# Altium PCB PCB.PcbDoc
Units mm, origin at the board's own origin, x right, y up, seen from the top; angles counter-clockwise.
Board outline 50 x 83.2 mm, 2 copper layers (Top Layer, Bottom Layer); 21 components, 10 nets, 72 pads, 0 vias.
Unrouted connection lines stored in the file: 40.
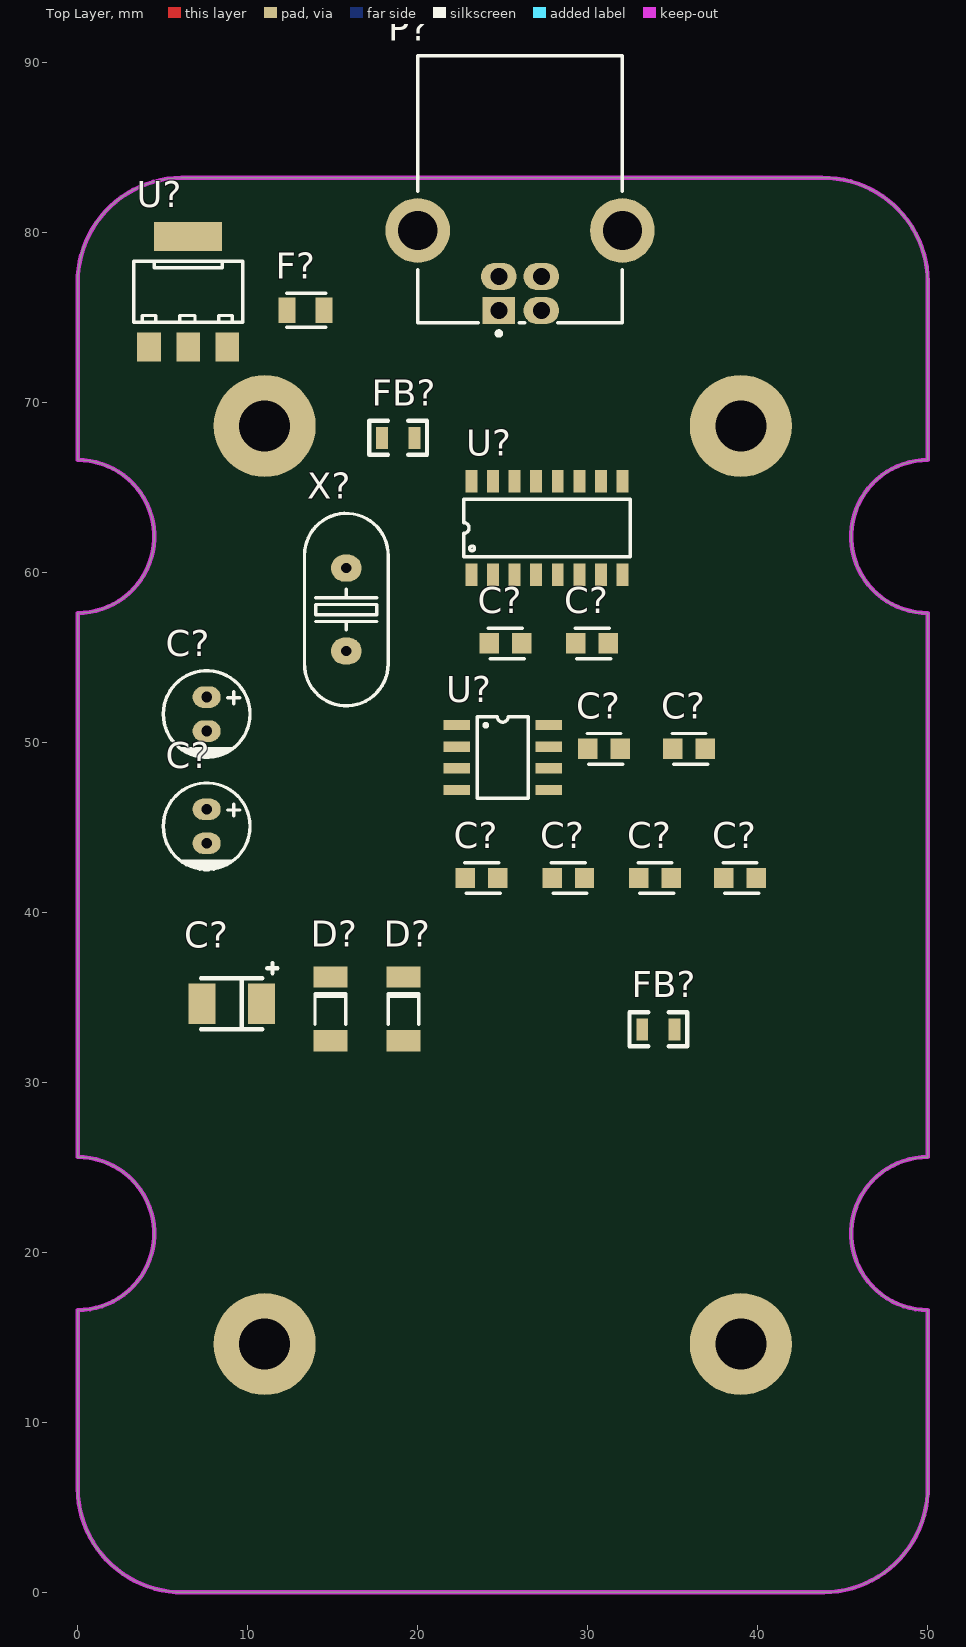
[diagram p0: Top Layer view]
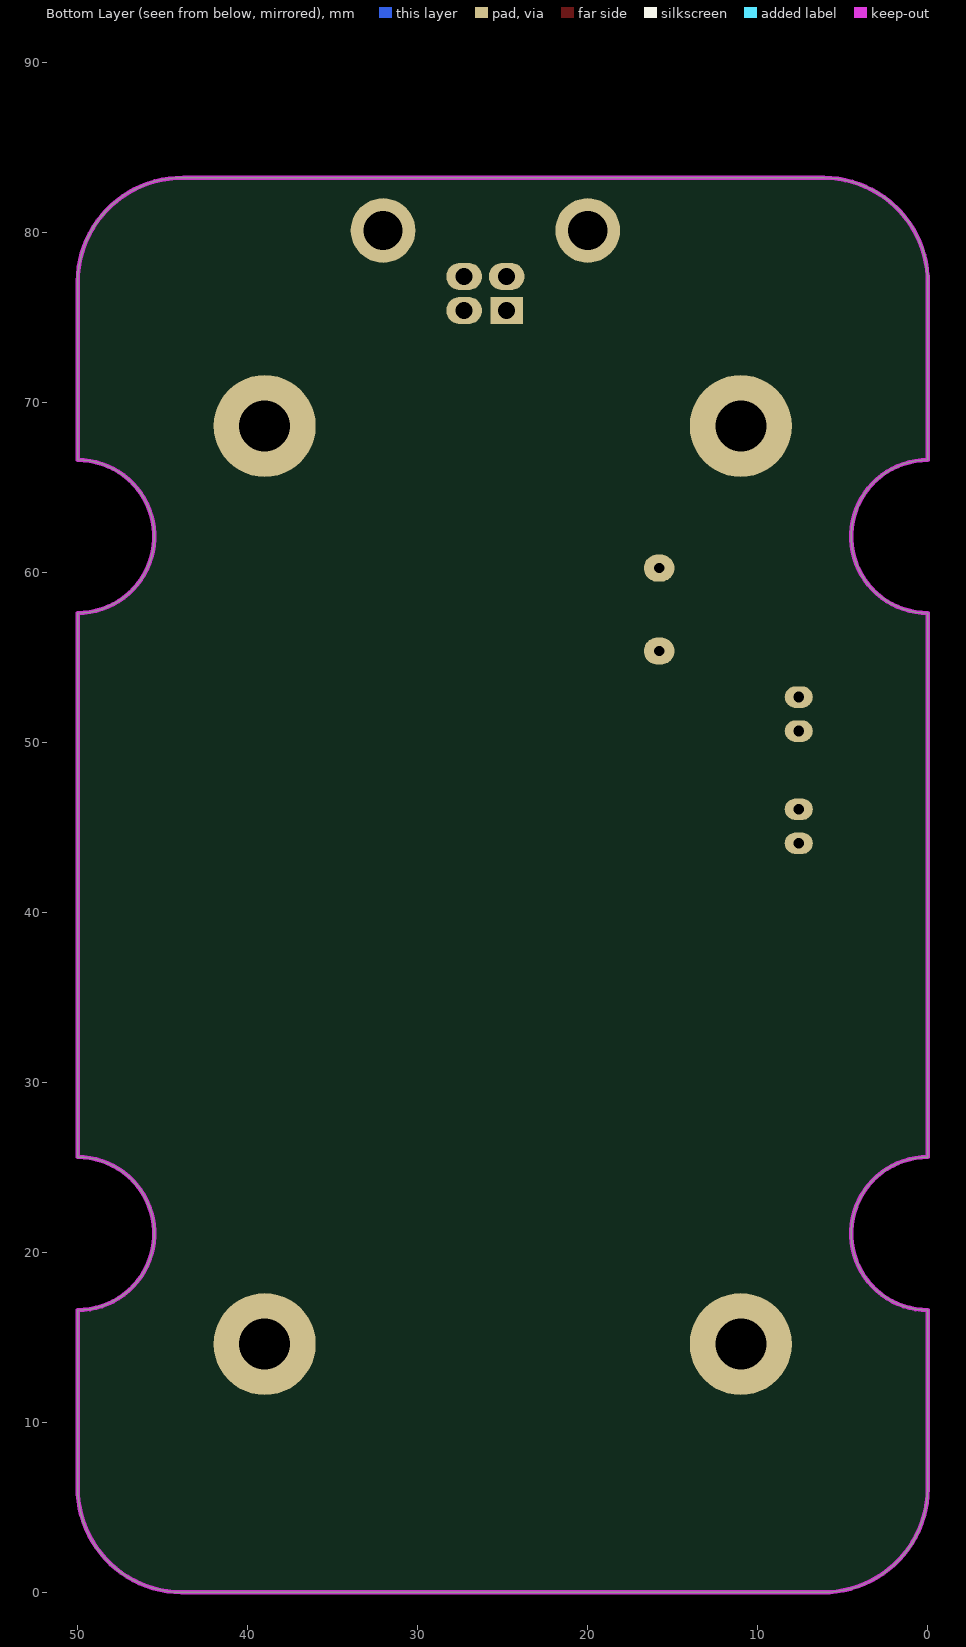
[diagram p1: Bottom Layer view, seen from below]

## Layer stack, top to bottom
Top Solder: solder mask 0.0102, Solder Resist, Dk 3.5
Top Layer: signal copper 0.0356
Dielectric 1: dielectric 0.32, FR-4, Dk 4.8
Bottom Layer: signal copper 0.0356
Bottom Solder: solder mask 0.0102, Solder Resist, Dk 3.5

## Board outline
0,6.1 0,16.6 ccw(c0,21.1) 0,25.6 0,57.6 ccw(c0,62.1) 0,66.6 0,77 cw(c6.15,77.05) 6.1,83.2 43.8,83.2 cw(c43.85,77.05) 50,77.1 50,66.6 ccw(c50,62.1) 50,57.6 50,25.6 ccw(c50,21.1) 50,16.6 50,6.2 cw(c43.85,6.15) 43.9,0 6.2,0 cw(c6.15,6.15)
cut-out: 45.6,62.5

## Design rules (kind name [scope] priority, off if disabled: settings)
Clearance [All] p1: gap=0.2 ignorepadtopadclearanceinfootprint=FALSE
DiffPairsRouting [All] p1: maxlimit=0.254 minlimit=0.254 mostfreqgap=0.254 toplayer_minwidth=0.381 toplayer_maxwidth=0.381 toplayer_prefwidth=0.381 bottomlayer_minwidth=0.381 bottomlayer_maxwidth=0.381 bottomlayer_prefwidth=0.381 maxuncoupledlength=12.7
HoleSize [All] p1: absolutevalues=TRUE maxlimit=10 minlimit=0.5 maxpercent=80.000 minpercent=20.000
PolygonConnect [All] p1: connectstyle=Relief reliefconductorwidth=0.254 reliefentries=4 polygonreliefangle="90 Angle" airgapwidth=0.254
RoutingVias [All] p1: holewidth=0.5 width=0.8 viastyle="Through Hole" minholewidth=0.5 minwidth=0.6 maxholewidth=0.5 maxwidth=1
ShortCircuit [All] p1: allowed=TRUE
SolderMaskExpansion [All] p1: expansion=0.102 istentingtop=FALSE
Width [All] p1: maxlimit=2.54 minlimit=0.254 preferedwidth=0.508
27 further rules are at their usual default settings.

## Classes and differential pairs
component class Sheet: C? D? F? FB? P? U? X?
differential pair USB: +USB_P -USB_N

## Components (designator, comment, footprint, x,y, rotation, side; value= is the part's Value field where it differs from the comment)
C? "10uF 16V" C-EL_5x11x2mm 7.587,45.057 r90 top
C? "22pF" C-0805 35.957,49.613 r0 top
C? "10uF" C-0805 33.957,42.013 r0 top
C? "10uF" C-0805 23.757,42.013 r0 top
C? "TAJB107K006RNJ" TAJB 9.057,34.613 r0 top
C? "10nF" C-0805 30.257,55.813 r0 top
C? "10uF" C-0805 25.157,55.813 r0 top
C? "100nF" C-0805 38.957,42.013 r0 top
C? "22pF" C-0805 30.957,49.613 r0 top
C? "100nF" C-0805 28.857,42.013 r0 top
C? "10uF 16V" C-EL_5x11x2mm 7.587,51.657 r90 top
D? "3V6" SOD80 14.857,34.313 r90 top
D? "3V6" SOD80 19.157,34.313 r90 top
F? "MF-PSMF050" MF-PSMF 13.4,75.4 r0 top
FB? "EBMS201209A101" R-0805 34.157,33.113 r0 top
FB? "EBMS201209A101" R-0805 18.85,67.9 r0 top
P? "USB Connector" USB2.5-2H4E 26.02,76.39 r90 top
U? "LD1117AS33TR" SOT-223 6.5,76.5 r0 top
U? "CH340G" SOP-16 27.6,62.6 r90 top
U? "TC7660COA" SOIC-8 25,49.1 r0 top
X? "12 Mhz" XTAL-DIP_Small 15.8,57.8 r90 top

## Footprints (in the part's own frame and the unit in brackets; to place one, negate y for a bottom-side part, rotate by r counter-clockwise, add the part's x,y. Pads: shape width x height; smd on the part's side, far side on the other; paste and mask are expansions set on the pad)
C-0805 [mm] "Multilayer Chip Capacitors - General"
  rect 1.14x1.2 smd: 1(-0.955,0) 2(0.955,0)
  silkscreen extent -1,-0.9 1.1,0.9, body extent -1,-0.63 1,0.62, height 0.81
C-EL_5x11x2mm [mm]
  oval 1.27x1.651 hole 0.635: A(1,0) K(-1,0)
  silkscreen extent -2.55,-2.55 2.55,2.55, body extent -2.5,-2.5 2.5,2.5, height 11.1
MF-PSMF [mm]
  rect 1x1.5 smd: 1(-1.1,0) 2(1.1,0)
  silkscreen extent -1.1,-1 1.2,1, body extent -1.15,-0.75 1.15,0.75, height 0.86
R-0805 [mm]
  rect 0.7x1.3 smd: 1(-0.95,0) 2(0.95,0)
  silkscreen extent -1.7,-1 1.7,1, body extent -1,-0.63 1,0.62, height 0.5
SOD80 [mm] "MiniMELF"
  rect 1.25x2 smd: A(-1.875,0) K(1.875,0)
  silkscreen extent -0.9,-0.9 0.9,0.9, body extent -1.82,-0.8 1.88,0.8, height 1.6
SOIC-8 [mm]
  rect 1.55x0.6 smd: 1(-2.7,1.905) 2(-2.7,0.635) 3(-2.7,-0.635) 4(-2.7,-1.905) 5(2.7,-1.905) 6(2.7,-0.635) 7(2.7,0.635) 8(2.7,1.905)
  silkscreen extent -1.5,-2.4 1.5,2.4, body extent -3,-2.45 3,2.45, height 1.7
SOP-16 [mm]
  rect 1.3x0.7 smd: 1(-2.75,4.445) 2(-2.75,3.175) 3(-2.75,1.905) 4(-2.75,0.635) 5(-2.75,-0.635) 6(-2.75,-1.905) 7(-2.75,-3.175) 8(-2.75,-4.445) 9(2.75,-4.445) 10(2.75,-3.175) 11(2.75,-1.905) 12(2.75,-0.635) 13(2.75,0.635) 14(2.75,1.905) 15(2.75,3.175) 16(2.75,4.445)
  silkscreen extent -1.7,-4.9 1.7,4.9, body extent -3.12,-4.99 3.12,4.99, height 1.58
SOT-223 [mm]
  rect 1.4x1.7 smd: 1(-2.3,-3.25) 2(0,-3.25) 3(2.3,-3.25)
  rect 4x1.7 smd: 4(0,3.25)
  silkscreen extent -3.2,-1.8 3.2,1.8, body extent -3.25,-3.47 3.25,3.47, height 1.64
TAJB [mm]
  rect 1.6x2.4 smd: A(1.75,0) K(-1.75,0)
  silkscreen extent -1.8,-1.5 2.7,2.4, body extent -1.75,-1.42 1.75,1.43, height 2.1
USB2.5-2H4E [mm]
  rect 1.6x1.9 hole 1: 1(-1,1.25)
  oval 1.6x2.1 hole 1: 2(-1,-1.25) 3(1,-1.25) 4(1,1.25)
  round 3.8 hole 2.3: 5(3.71,6.02) 6(3.71,-6.02)
  silkscreen extent -2.47,-6.02 13.99,6.02, body extent -2.5,-7.45 14,7.45, height 10.95
XTAL-DIP_Small [mm]
  oval 1.6x1.8 hole 0.6: 1(-2.44,0) 2(2.44,0)
  silkscreen extent -5.66,-2.46 5.66,2.46, body extent -5.75,-2.5 5.75,2.5, height 3.55

## Part data
C? C?: library part CAP-EL, "CAPACITOR ELECTROLYTIC"
C? C? C? C? C? C? C? C?: library part CAP, "SMD 0805"
C?: "AVX - TAJB107K006RNJ - Surface Mount Tantalum Capacitor, 100 µF, 6.3 V, 1411 [3528 Metric], TAJ Series, ± 10%, -55 °C", Capacitance=100uF, Case Code (Imperial)=1210, Case Code (Metric)=3528, Dielectric Material=Tantalum, ESR (Equivalent Series Resistance)=1.7R, Leakage Current=6.3uA, Manufacturer="Kyocera AVX", Max Operating Temperature=125°C, Min Operating Temperature=-55°C, Package Quantity=1, Supplier Part Number 1=478-1677-1-ND, Tolerance=10%, Voltage=6.3V, Case/Package=1210, Category="Tantalum Capacitors", ComponentLink1Description=https://datasheet.ciiva.com/11794/0900766b802e69d0-11794415.pdf?src-supplier=RSComponents, ComponentLink1URL=https://datasheet.ciiva.com/11794/0900766b802e69d0-11794415.pdf?src-supplier=RSComponents, ComponentLink2Description=https://datasheet.ciiva.com/26915/getdatasheetpartid-133381-26915174.pdf?src-supplier=Verical, ComponentLink2URL=https://datasheet.ciiva.com/26915/getdatasheetpartid-133381-26915174.pdf?src-supplier=Verical, ComponentLink3Description=https://datasheet.ciiva.com/18710/taj-eng-18710634.pdf?src-supplier=Distrelec, ComponentLink3URL=https://datasheet.ciiva.com/18710/taj-eng-18710634.pdf?src-supplier=Distrelec, ComponentLink4Description=https://datasheet.ciiva.com/7720/1680476-7720606.pdf?src-supplier=Element14, ComponentLink4URL=https://datasheet.ciiva.com/7720/1680476-7720606.pdf?src-supplier=Element14, ComponentLink5Description=https://datasheet.ciiva.com/7720/1680476-7720607.pdf?src-supplier=Element14, ComponentLink5URL=https://datasheet.ciiva.com/7720/1680476-7720607.pdf?src-supplier=Element14, ComponentLink6Description=https://datasheet.ciiva.com/264/taj-264188.pdf?src-supplier=Digi-Key, ComponentLink6URL=https://datasheet.ciiva.com/264/taj-264188.pdf?src-supplier=Digi-Key, ComponentLink7Description=https://datasheet.ciiva.com/264/taj-264187.pdf?src-supplier=Digi-Key, ComponentLink7URL=https://datasheet.ciiva.com/264/taj-264187.pdf?src-supplier=Digi-Key, ComponentLink8Description=https://datasheet.ciiva.com/264/taj-264189.pdf?src-supplier=Digi-Key, ComponentLink8URL=https://datasheet.ciiva.com/264/taj-264189.pdf?src-supplier=Digi-Key, ComponentLink9Description=https://datasheet.ciiva.com/14602/70001050-14602126.pdf?src-supplier=Allied+Electronics, ComponentLink9URL=https://datasheet.ciiva.com/14602/70001050-14602126.pdf?src-supplier=Allied+Electronics, ComponentLink10Description=https://datasheet.ciiva.com/14599/70001050-14599717.pdf?src-supplier=Allied+Electronics, ComponentLink10URL=https://datasheet.ciiva.com/14599/70001050-14599717.pdf?src-supplier=Allied+Electronics, ComponentLink11Description=https://datasheet.ciiva.com/11224/taj-11224955.pdf?src-supplier=Avnet, ComponentLink11URL=https://datasheet.ciiva.com/11224/taj-11224955.pdf?src-supplier=Avnet, ComponentLink12Description=https://datasheet.ciiva.com/16632/taj-16632597.pdf?src-supplier=Avnet+Europe, ComponentLink12URL=https://datasheet.ciiva.com/16632/taj-16632597.pdf?src-supplier=Avnet+Europe, Construction=Flat, Depth=2.8mm, Dissipation Factor=10%, Features="General Purpose", Height=1.9mm, Height - Seated (Max)=0.083inch, Lead Free="Lead Free", Length=3.5mm, Manufacturer Part Number=TAJB107K006RNJ, Mount="Surface Mount,PCB", Packaging="Tape and Reel", Polarity=Polar, Pricing 1="1=0/71000, 10=0/52500, 50=0/41980, 100=0/35980, 500=0/28486, 1000=0/23989 (USD)", Radiation Hardening=No, REACH SVHC="No SVHC", RoHS=Yes, RoHS Compliant=Yes, Series=TAJ, Stock 1=10000, Supplier 1=Digi-Key, Termination=SMD/SMT, Voltage Rating=6.3V, Voltage Rating (DC)=6.3V, Width=2.8mm
D? D?: library part DIODE-Z, "SMD MiniMELF"
F?: library part MF-PSMF050X-2, "BOURNS   MF-PSMF050X-2   FUSE, RESETTABLE PTC, 6V, 500MA, 0805", Case Code (Imperial)=0805, Case Code (Metric)=2012, Current Rating=40A, Hold Current=500mA, Manufacturer=Bourns, Max Operating Temperature=85°C, Max Power Dissipation=500mW, Min Operating Temperature=-40°C, Operating Supply Voltage=6V, Package Quantity=3000, Resistance=900mR, Supplier Part Number 1=MF-PSMF050X-2CT-ND, Trip Current=1A, Approvals=UL, Case/Package=0805, Category="PTC Resettable Fuses", ComponentLink1Description=https://datasheet.ciiva.com/3019/mfpsmf-3019798.pdf?src-supplier=Avnet, ComponentLink1URL=https://datasheet.ciiva.com/3019/mfpsmf-3019798.pdf?src-supplier=Avnet, ComponentLink2Description=https://datasheet.ciiva.com/3019/mfpsmf-3019799.pdf?src-supplier=Avnet, ComponentLink2URL=https://datasheet.ciiva.com/3019/mfpsmf-3019799.pdf?src-supplier=Avnet, ComponentLink3Description=https://datasheet.ciiva.com/22657/1442129-22657847.pdf?src-supplier=Element14, ComponentLink3URL=https://datasheet.ciiva.com/22657/1442129-22657847.pdf?src-supplier=Element14, ComponentLink4Description=https://datasheet.ciiva.com/26946/getdatasheetpartid-137409-26946007.pdf?src-supplier=Verical, ComponentLink4URL=https://datasheet.ciiva.com/26946/getdatasheetpartid-137409-26946007.pdf?src-supplier=Verical, ComponentLink5Description=https://datasheet.ciiva.com/326/mfpsmf-326488.pdf?src-supplier=Digi-Key, ComponentLink5URL=https://datasheet.ciiva.com/326/mfpsmf-326488.pdf?src-supplier=Digi-Key, ComponentLink6Description=https://datasheet.ciiva.com/326/mfpsmf-326489.pdf?src-supplier=Digi-Key, ComponentLink6URL=https://datasheet.ciiva.com/326/mfpsmf-326489.pdf?src-supplier=Digi-Key, ComponentLink7Description=https://datasheet.ciiva.com/326/mfpsmf-326490.pdf?src-supplier=Digi-Key, ComponentLink7URL=https://datasheet.ciiva.com/326/mfpsmf-326490.pdf?src-supplier=Digi-Key, ComponentLink8Description=https://datasheet.ciiva.com/4501/mfpsmf-69505-4501179.pdf?src-supplier=Mouser, ComponentLink8URL=https://datasheet.ciiva.com/4501/mfpsmf-69505-4501179.pdf?src-supplier=Mouser, ComponentLink9Description=https://datasheet.ciiva.com/32430/mf-psmf-series-eng-tds-32430651.pdf?src-supplier=Distrelec, ComponentLink9URL=https://datasheet.ciiva.com/32430/mf-psmf-series-eng-tds-32430651.pdf?src-supplier=Distrelec, ComponentLink10Description=https://datasheet.ciiva.com/1274/1442129-1274589.pdf?src-supplier=Element14, ComponentLink10URL=https://datasheet.ciiva.com/1274/1442129-1274589.pdf?src-supplier=Element14, ComponentLink11Description=https://datasheet.ciiva.com/17401/mfpsmf-17401741.pdf?src-supplier=Avnet+Europe, ComponentLink11URL=https://datasheet.ciiva.com/17401/mfpsmf-17401741.pdf?src-supplier=Avnet+Europe, ComponentLink12Description=https://datasheet.ciiva.com/22712/1442129-22712191.pdf?src-supplier=Element14, ComponentLink12URL=https://datasheet.ciiva.com/22712/1442129-22712191.pdf?src-supplier=Element14, Height=0.85mm, Length=2.3mm, Manufacturer Part Number=MF-PSMF050X-2, Max Current Rating=40A, Mount="Surface Mount,PCB", Number of Pins=2, Number of Terminals/Pins=2, Packaging="Tape and Reel", Power Dissipation=500mW, Pricing 1="1=0/80000, 5=0/78000, 10=0/75600, 50=0/63600, 100=0/52800, 250=0/48000, 500=0/40800, 1000=0/36000 (USD)", Radiation Hardening=No, REACH SVHC="No SVHC", RoHS=Yes, RoHS Compliant=Yes, Series=MF-PSMF, Stock 1=9973, Supplier 1=Digi-Key, Terminal Material=Gold, Termination=SMD/SMT, Time to Trip=0.1s, Voltage Rating=6V, Voltage Rating (DC)=6V, Width=1.5mm
FB? FB?: "FERRITE BEAD 0805 100R 100Mhz"
P?: library part USB-B, "USB Connector-B Type", Adding Date=10/26/2010, Company="DASE Co", Designer="Eng. Saeid Jorablo"
U?: "IC REG LINEAR 3.3V 1A SOT223", Case/Package=SOT-223, Dropout Voltage=1.15V, Input Bias Current=5mA, Manufacturer=STMicroelectronics, Max Input Voltage=10V, Max Operating Temperature=125°C, Max Output Current=1.2A, Max Power Dissipation=12W, Min Input Voltage=5.3V, Min Operating Temperature=0°C, Min Output Voltage=3.3V, Output Current=1A, Output Voltage Accuracy=2%, Package Quantity=1, Quiescent Current=10mA, Supplier Part Number 1=497-1228-1-ND, Accuracy=2%, Category="Voltage Regulators - Linear", ComponentLink1Description=https://datasheet.ciiva.com/7993/1732936-7993322.pdf?src-supplier=Element14, ComponentLink1URL=https://datasheet.ciiva.com/7993/1732936-7993322.pdf?src-supplier=Element14, ComponentLink2Description=https://datasheet.ciiva.com/7993/1732936-7993323.pdf?src-supplier=Element14, ComponentLink2URL=https://datasheet.ciiva.com/7993/1732936-7993323.pdf?src-supplier=Element14, ComponentLink3Description=https://datasheet.ciiva.com/16375/cd00002116-16375420.pdf?src-supplier=Future+Electronics, ComponentLink3URL=https://datasheet.ciiva.com/16375/cd00002116-16375420.pdf?src-supplier=Future+Electronics, ComponentLink4Description=https://datasheet.ciiva.com/2042/cd00002116-2042573.pdf?src-supplier=Digi-Key, ComponentLink4URL=https://datasheet.ciiva.com/2042/cd00002116-2042573.pdf?src-supplier=Digi-Key, ComponentLink5Description=https://datasheet.ciiva.com/2042/cd00002116-2042574.pdf?src-supplier=Digi-Key, ComponentLink5URL=https://datasheet.ciiva.com/2042/cd00002116-2042574.pdf?src-supplier=Digi-Key, ComponentLink6Description=https://datasheet.ciiva.com/2042/cd00002116-2042575.pdf?src-supplier=Digi-Key, ComponentLink6URL=https://datasheet.ciiva.com/2042/cd00002116-2042575.pdf?src-supplier=Digi-Key, Contact Plating=Tin,Matte, Height=1.8mm, Lead Free="Lead Free", Length=6.5mm, Manufacturer Part Number=LD1117AS33TR, Mount="Surface Mount", Nominal Output Voltage=3.3V, Number of Outputs=1, Number of Pins=4, Number of Regulators=1, Output Type=Fixed, Output Voltage=3.3V, Packaging="Tape and Reel", Polarity=Positive, Power Dissipation=12W, Pricing 1="1=0/98000, 10=0/86000, 25=0/80760, 100=0/65920, 250=0/61228, 500=0/52110, 1000=0/43015 (USD)", Radiation Hardening=No, REACH SVHC="No SVHC", RoHS=Yes, RoHS Compliant=Yes, Series=-, Stock 1=4724, Supplier 1=Digi-Key, Weight=0.01lb, Width=3.5mm
U?: "IC USB to Serial", Case/Package=MSOP-10
U?: "IC REG SWTCHD CAP INV 20MA 8SOIC", Case/Package=SOIC, Manufacturer=Microchip, Max Input Voltage=10V, Max Operating Temperature=70°C, Max Output Current=20mA, Max Output Voltage=-10V, Min Input Voltage=1.5V, Min Operating Temperature=0°C, Min Output Voltage=3.5V, Output Power=470mW, Output Voltage=-1.5V, Package Quantity=100, Supplier Part Number 1=TC7660COA-ND, Switching Frequency=10kHz, Category="Voltage Regulators - Switching", ComponentLink1Description=https://datasheet.ciiva.com/14666/0900766b800a5735-14666575.pdf?src-supplier=RSComponents, ComponentLink1URL=https://datasheet.ciiva.com/14666/0900766b800a5735-14666575.pdf?src-supplier=RSComponents, ComponentLink2Description=https://datasheet.ciiva.com/41463/001085694-da-01-en-ic-reg-switchd-cap-tc7660coa-soic-8-mcp-41463379.pdf?src-supplier=Conrad, ComponentLink2URL=https://datasheet.ciiva.com/41463/001085694-da-01-en-ic-reg-switchd-cap-tc7660coa-soic-8-mcp-41463379.pdf?src-supplier=Conrad, ComponentLink3Description=https://datasheet.ciiva.com/2029/filehandler-aspxddocname-en011631-2029173.pdf?src-supplier=Digi-Key, ComponentLink3URL=https://datasheet.ciiva.com/2029/filehandler-aspxddocname-en011631-2029173.pdf?src-supplier=Digi-Key, ComponentLink4Description=https://datasheet.ciiva.com/16211/filehandler-aspxddocname-en011631-16211183.pdf?src-supplier=Future+Electronics, ComponentLink4URL=https://datasheet.ciiva.com/16211/filehandler-aspxddocname-en011631-16211183.pdf?src-supplier=Future+Electronics, Contact Plating=Tin,Matte, Efficiency=98%, Height=1.42mm, Lead Free="Lead Free", Length=4.9mm, Logic Function=Inverting, Manufacturer Part Number=TC7660COA, Max Supply Voltage=10V, Min Supply Voltage=1.5V, Mount="Surface Mount", Number of Outputs=1, Number of Pins=8, Output Current=20mA, Output Type=Fixed, Packaging=Rail/Tube, Pricing 1="1=0/88000, 25=0/73160, 100=0/66780 (USD)", Radiation Hardening=No, REACH SVHC="No SVHC", RoHS=Yes, RoHS Compliant=Yes, Stock 1=335, Supplier 1=Digi-Key, Switching Frequency-Max=10kHz, Synchronous Rectifier=No, Topology="Charge Pump", Weight=0.006596oz, Width=3.91mm
X?: library part XTAL, "Crystal oscillator"

## Free pads (board coordinates)
  round 6 hole 3 unplated paste+0 mask+0.04: 0(11,14.6) 0(11,68.6) 0(39,14.6) 0(39,68.6)

## Nets (pads, with @x,y where several pads share a name; then routed paths per layer and width w, separated by ;. In a path a pad name is that pad's centre, name@x,y a point inside that pad or via, vN(x,y) a via of type N, cw(c..) or ccw(c..) an arc to the next point about the centre after c; other vN are vias at no path point)
+3.3: C?.1@33.002,42.013 C?.1@38.002,42.013 FB?.1@17.9,67.9 U?.2@6.5,73.25 U?.4@6.5,79.75
+5: C?.A@10.807,34.613 F?.2 FB?.1@33.207,33.113 U?.8@27.7,51.005
-5: C?.K@7.587,44.057 U?.5@27.7,47.195
GND: C?.2 C?.A@7.587,46.057 C?.K@7.307,34.613 D?.A P?.4 P?.5 P?.6 pad.0 U?.1@4.2,73.25 U?.1@23.155,59.85 U?.3@22.3,48.465
NetC?_1: C?.1@24.202,55.813 C?.1@29.302,55.813 FB?.2@19.8,67.9 U?.4@26.965,59.85 U?.16
NetC?_A: C?.A@7.587,52.657 U?.2@22.3,49.735
NetC?_K: C?.K@7.587,50.657 U?.4@22.3,47.195
NetF?_1: F?.1 P?.1
USB_N: D?.K@14.857,36.188 P?.2 U?.6@29.505,59.85
USB_P: D?.K@19.157,36.188 P?.3 U?.5@28.235,59.85
pads on no net: C?.1@22.802,42.013 C?.1@27.902,42.013 C?.1@30.002,49.613 C?.1@35.002,49.613 FB?.2@35.107,33.113 U?.1@22.3,51.005 U?.2@24.425,59.85 U?.3@8.8,73.25 U?.3@25.695,59.85 U?.6@27.7,48.465 U?.7 U?.8@32.045,59.85 U?.9 U?.10 U?.11 U?.12 U?.13 U?.14 U?.15 X?.1 X?.2

## Keep-outs
Keep-Out Layer:
  lines w0.254: 0,6.1 ccw(c6.15,6.15) 6.2,0 43.9,0 ccw(c43.85,6.15) 50,6.2 50,16.6 cw(c50,21.1) 50,25.6 50,57.6 cw(c50,62.1) 50,66.6 50,77.1 ccw(c43.85,77.05) 43.8,83.2 6.1,83.2 ccw(c6.15,77.05) 0,77 0,67 0,66.6 cw(c0,62.1) 0,57.6 0,25.6 cw(c0,21.1) 0,16.6 0,6.1